# EAGLE board SwerveCANConnectorGood_v3 (EAGLE 9.7.0)
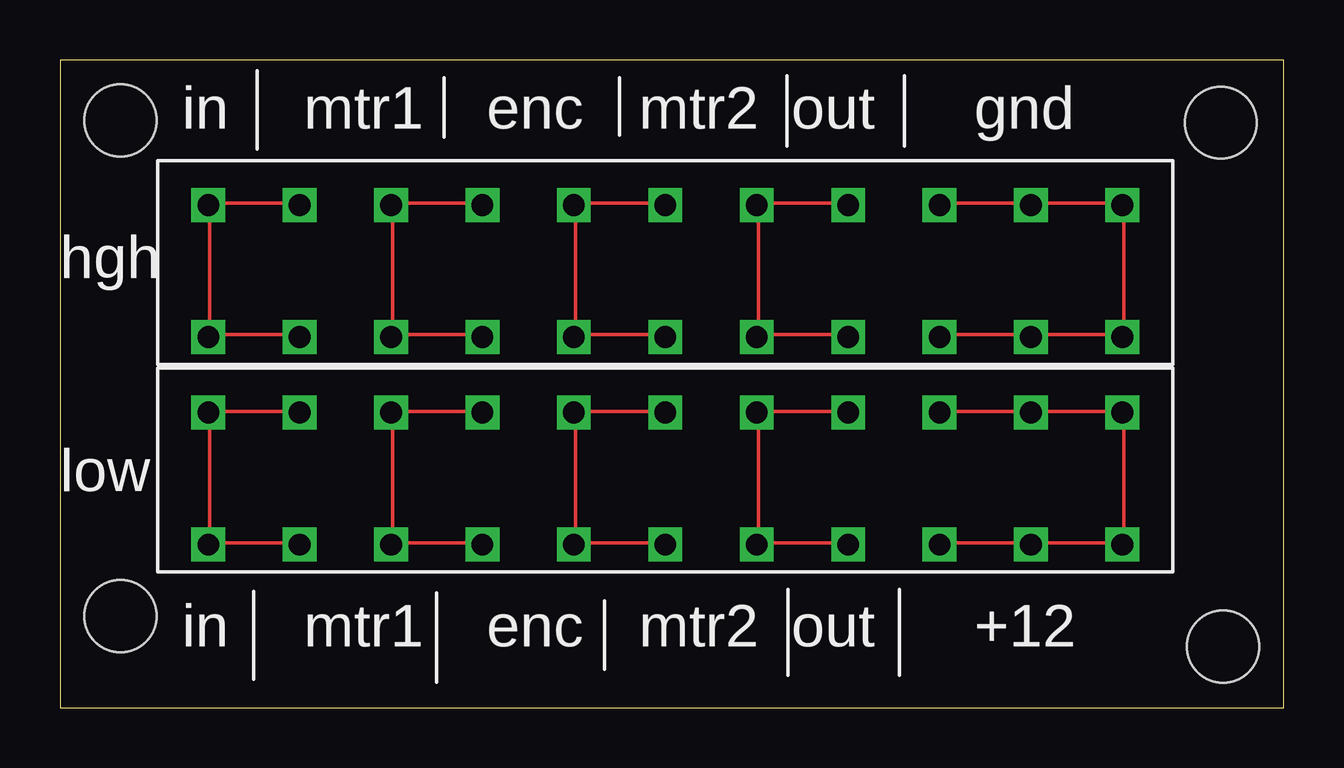
[diagram p0: board, top side]

Size 51 x 27 mm. Coordinates in mm from the lower left corner, seen from the top.
Outline: 0,0 51,0 51,27 0,27 0,0
Copper layers (1*16): Top / Bottom
Stack-up Default Layer Stack: Top User Defined 0.035mm / Dielectric-1 User Defined 1.5mm / Bottom User Defined 0.035mm
Design rules "default": minimum track width 6mil, minimum drill 0.35mm, track to track 6mil, track to pad 6mil, pad to pad 6mil, via to via 6mil, smd to smd 6mil, copper to edge 40mil, drill to drill 6mil, minimum pad ring 10mil, minimum via ring 8mil, stop-mask expansion 4mil, vias tented up to drill 0mil, thermal gap 10mil
Holes 3 mm at 2.52,3.81 2.52,24.48 48.38,24.38 48.48,2.54

## Footprints (pad centres in the part's own frame; a part is rotated, then mirrored left to right if it is on the bottom)
WEIDM-1825890000 = drill 0.9 square: PIN1 0,0; PIN2 3.81,0; PIN3 7.62,0; PIN4 11.43,0; PIN5 15.24,0; PIN6 19.05,0; PIN7 22.86,0; PIN8 26.67,0; PIN9 30.48,0; PIN10 34.29,0; PIN11 38.1,0; PIN12 0,5.5; PIN13 3.81,5.5; PIN14 7.62,5.5; PIN15 11.43,5.5; PIN16 15.24,5.5; PIN17 19.05,5.5; PIN18 22.86,5.5; PIN19 26.67,5.5; PIN20 30.48,5.5; PIN21 34.29,5.5; PIN22 38.1,5.5

## Placement (x,y rotation side)
U$1  WEIDM-1825890000  [WEIDM-1825890000]  6.18,6.8 0 top
U$2  WEIDM-1825890000  [WEIDM-1825890000]  6.18,15.45 0 top

## Library data of the parts
U$1 U$2 = StealthEE

## Nets
N$1: U$1.PIN1 U$1.PIN2 U$1.PIN12 U$1.PIN13
N$2: U$1.PIN3 U$1.PIN4 U$1.PIN14 U$1.PIN15
N$3: U$1.PIN5 U$1.PIN6 U$1.PIN16 U$1.PIN17
N$4: U$1.PIN7 U$1.PIN8 U$1.PIN18 U$1.PIN19
N$5: U$1.PIN9 U$1.PIN10 U$1.PIN11 U$1.PIN20 U$1.PIN21 U$1.PIN22
N$6: U$2.PIN1 U$2.PIN2 U$2.PIN12 U$2.PIN13
N$7: U$2.PIN3 U$2.PIN4 U$2.PIN14 U$2.PIN15
N$8: U$2.PIN5 U$2.PIN6 U$2.PIN16 U$2.PIN17
N$9: U$2.PIN7 U$2.PIN8 U$2.PIN18 U$2.PIN19
N$10: U$2.PIN9 U$2.PIN10 U$2.PIN11 U$2.PIN20 U$2.PIN21 U$2.PIN22

## Tracks (layer width: path | path; a pad name or v marks a point on that pad's centre or on a via)
N$1
  Top 0.152: 6.25,6.86 9.91,6.86 U$1.PIN2 | U$1.PIN13 9.91,12.34 6.25,12.34 U$1.PIN12 6.25,12.19 6.25,6.86 | 6.25,6.86 U$1.PIN1
N$2
  Top 0.152: 13.87,6.86 17.53,6.86 U$1.PIN4 | U$1.PIN15 17.53,12.34 13.87,12.34 U$1.PIN14 13.87,12.19 13.87,6.86 | 13.87,6.86 U$1.PIN3
N$3
  Top 0.152: 21.49,6.86 25.15,6.86 U$1.PIN6 | U$1.PIN17 25.15,12.34 21.49,12.34 U$1.PIN16 21.49,12.19 21.49,6.86 | 21.49,6.86 U$1.PIN5
N$4
  Top 0.152: 29.11,6.86 32.77,6.86 U$1.PIN8 | U$1.PIN19 32.77,12.34 29.11,12.34 U$1.PIN18 29.11,12.19 29.11,6.86 | 29.11,6.86 U$1.PIN7
N$5
  Top 0.152: U$1.PIN9 36.73,6.86 40.39,6.86 U$1.PIN10 40.54,6.86 44.2,6.86 U$1.PIN11 44.35,6.86 44.35,12.19 U$1.PIN22 44.2,12.34 40.54,12.34 U$1.PIN21 40.39,12.34 36.73,12.34 U$1.PIN20
N$6
  Top 0.152: 6.25,15.54 9.91,15.54 U$2.PIN2 | U$2.PIN13 9.91,21.03 6.25,21.03 U$2.PIN12 6.25,20.88 6.25,15.54 | 6.25,15.54 U$2.PIN1
N$7
  Top 0.152: 13.87,15.54 17.53,15.54 U$2.PIN4 | U$2.PIN15 17.53,21.03 13.87,21.03 U$2.PIN14 13.87,20.88 13.87,15.54 | 13.87,15.54 U$2.PIN3
N$8
  Top 0.152: 21.49,15.54 25.15,15.54 U$2.PIN6 | U$2.PIN17 25.15,21.03 21.49,21.03 U$2.PIN16 21.49,20.88 21.49,15.54 | 21.49,15.54 U$2.PIN5
N$9
  Top 0.152: 29.11,15.54 32.77,15.54 U$2.PIN8 | U$2.PIN19 32.77,21.03 29.11,21.03 U$2.PIN18 29.11,20.88 29.11,15.54 | 29.11,15.54 U$2.PIN7
N$10
  Top 0.152: U$2.PIN9 36.73,15.54 40.39,15.54 U$2.PIN10 40.54,15.54 44.2,15.54 U$2.PIN11 44.35,15.54 44.35,20.88 U$2.PIN22 44.2,21.03 40.54,21.03 U$2.PIN21 40.39,21.03 36.73,21.03 U$2.PIN20

## Text on the board
tNames: in | mtr1 | enc | mtr2 | out | gnd | hgh | low | in | mtr1 | enc | mtr2 | out | +12